# Altium PCB EST_MainV20.PcbDoc (part 5 of 7)
Units mil, origin at the board's own origin, x right, y up, seen from the top; angles counter-clockwise.
Board outline 2745 x 4540 mil, 2 copper layers (Top Layer, Bottom Layer); 326 components, 241 nets, 1052 pads, 399 vias.
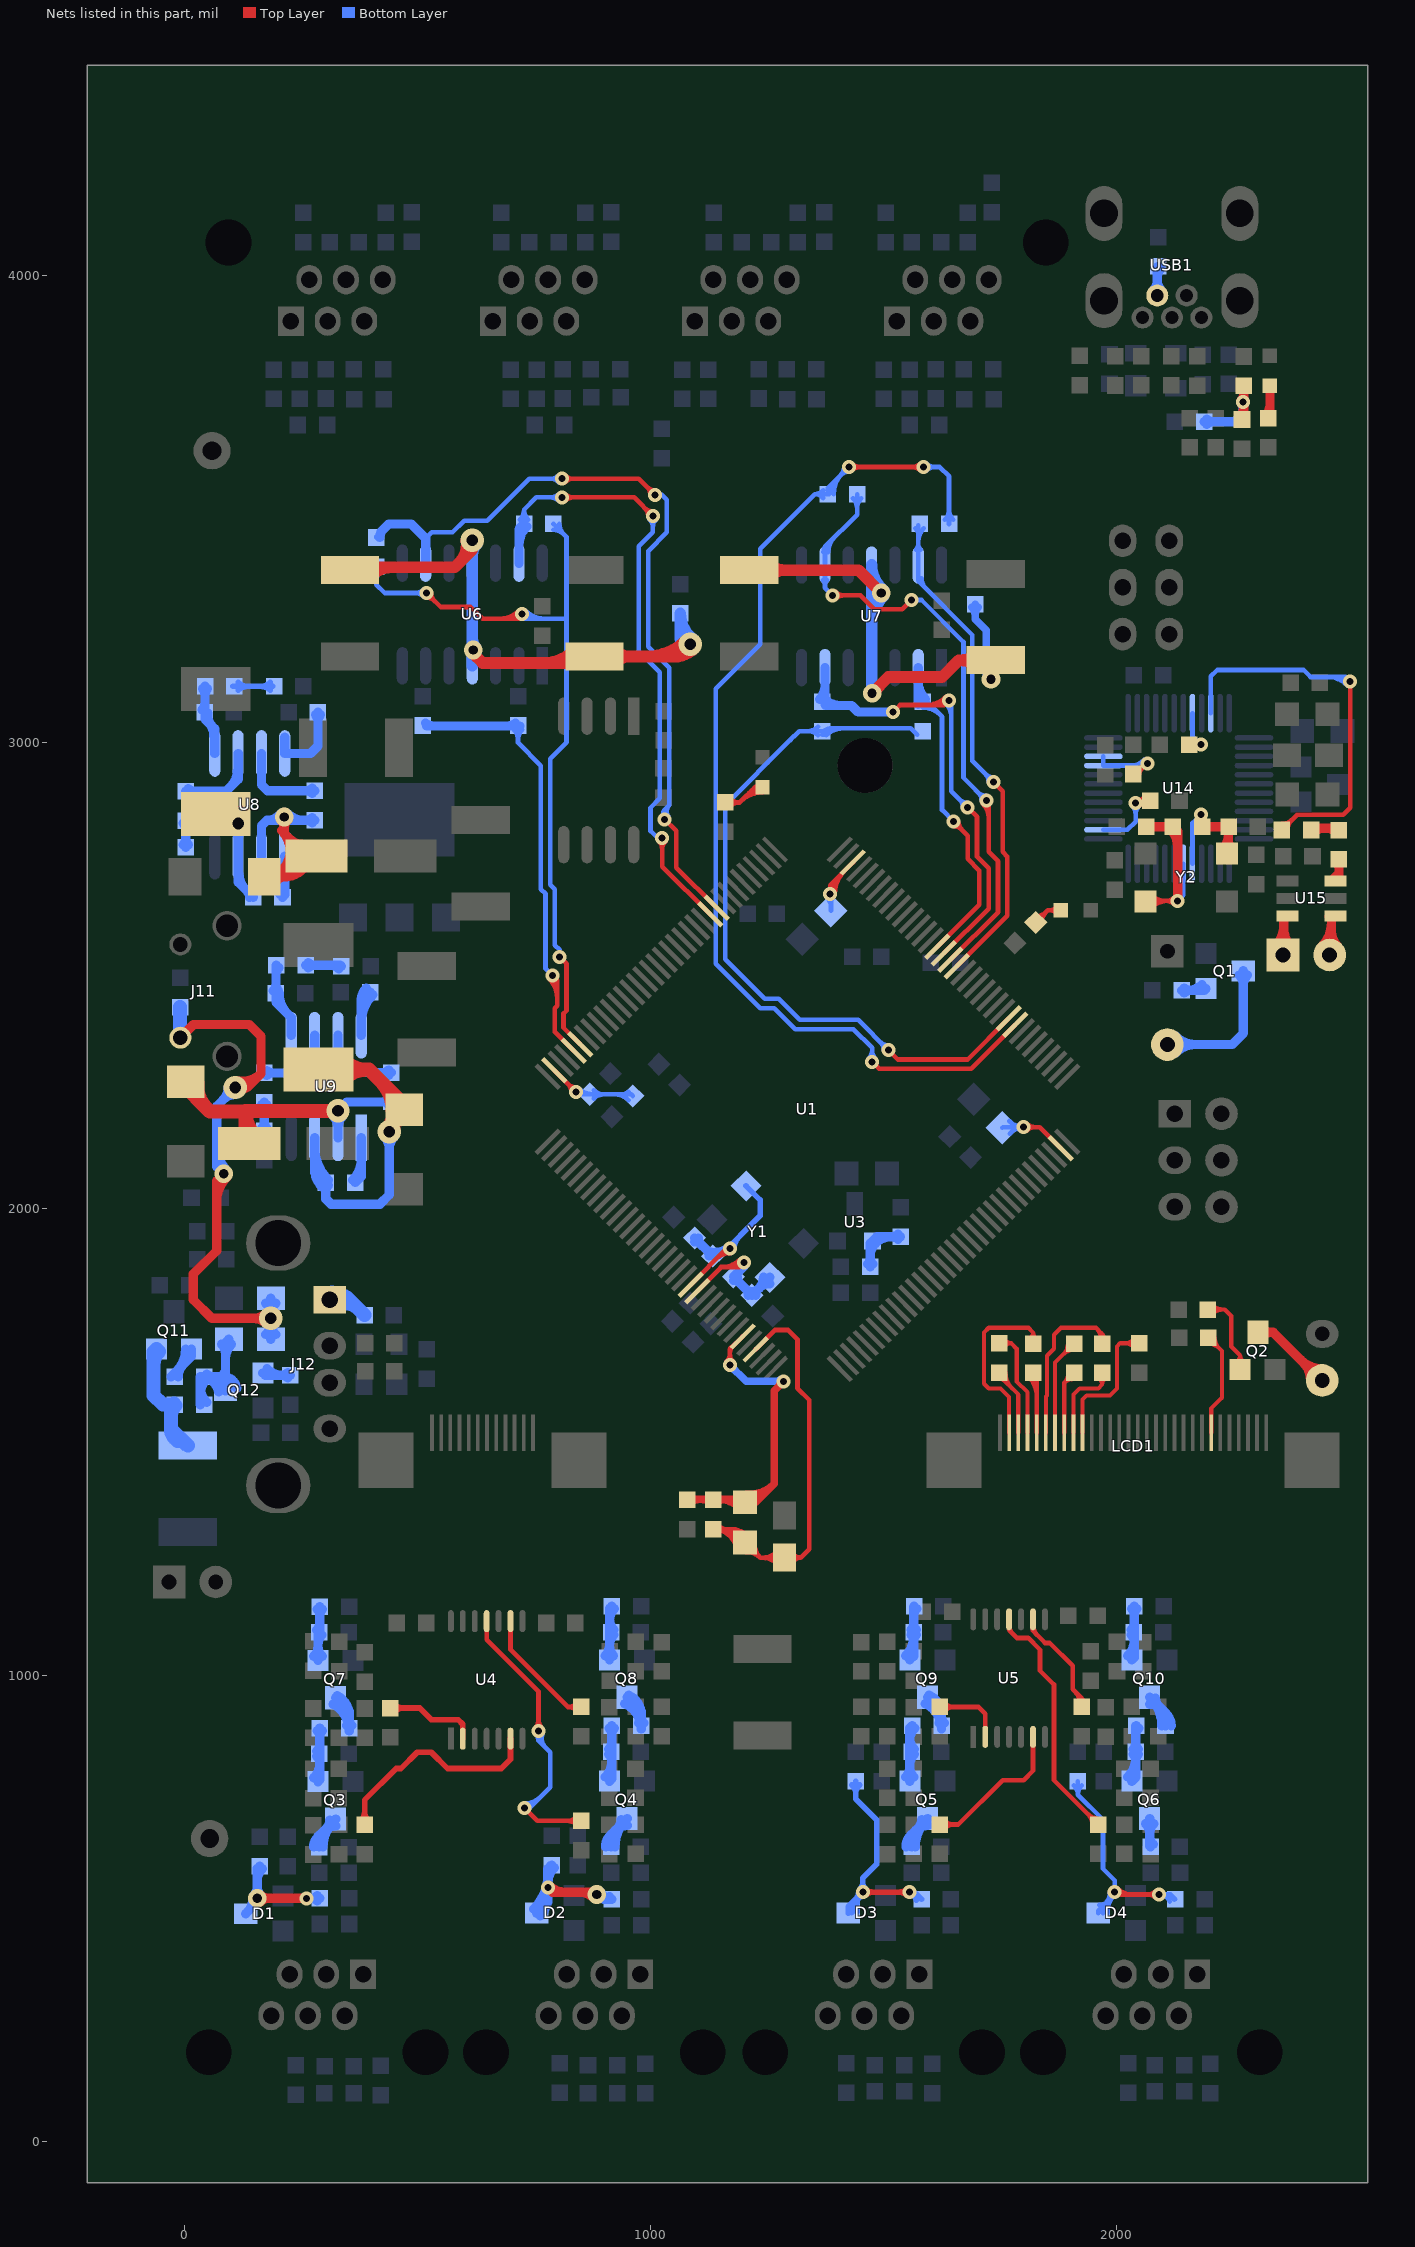
[diagram p5: the nets of this part, all layers, seen from the top]

## Via types
v1: diameter 30, hole 15, Top Layer to Bottom Layer, 237 vias
v2: diameter 50, hole 25, Top Layer to Bottom Layer, 93 vias
v3: diameter 40, hole 20, Top Layer to Bottom Layer, 68 vias
v4: diameter 60, hole 25, Top Layer to Bottom Layer, 1 vias

## Nets (pads, with @x,y where several pads share a name; then routed paths per layer and width w, separated by ;. In a path a pad name is that pad's centre, name@x,y a point inside that pad or via, vN(x,y) a via of type N, cw(c..) or ccw(c..) an arc to the next point about the centre after c; other vN are vias at no path point) (continued)
MAPWM: R105.2 R106.2 U1.140 | length 1106.5
  Top Layer w10: v1@782.93,2492.93 cw(c741.72,2451.72) 800,2451.72 ; 800,2475.86 ccw(c765.86,2475.86) v1(790,2500) 800,2490 800,2435 795,2430 795,2379.05 U1.140@835.41,2338.64
  Bottom Layer w10: R105.2@707.02,3027.02 cw(c685.32,3005.31) 716.02,3005.31 cw(c746.72,3005.31) R105.2@725.01,3027.02 ; R105.2@716.02,3036.01 716.02,3035 716.02,2998.98 765,2950 765,2685 775,2675 775,2515 v1(790,2500)
  Bottom Layer w20: R106.2@517.47,3041.46 ccw(c533.08,3057.07) 533.08,3035 ; R106.2@520,3035 716.02,3035 R105.2@720,3035 ; 694.95,3035 ccw(c694.95,3057.07) R105.2@710.56,3041.46
MBIN0: R108.1 U1.118 U6.9 | length 1916.6
  Top Layer w10: v1(810,3565) 975,3565 v1(1010,3530) ; v1@817.07,3557.93 cw(c834.14,3540.86) 834.14,3565 cw(c834.14,3589.14) v1@817.07,3572.07 ; v1@1000,3530 ccw(c975.86,3530) 992.93,3547.07 ccw(c1010,3564.14) v1@1010,3540 ; v1(1030,2835) 1055,2810 1055,2731.5 U1.118@1141.64,2644.86
  Bottom Layer w10: R108.1@412.02,3439 412.02,3441 R108.1@423,3451.98 ; 518,3437 531,3450 575.5,3450 600.5,3475 650,3475 740,3565 v1(810,3565) ; v1@802.93,3557.93 ccw(c785.86,3540.86) 785.86,3565 ccw(c785.86,3589.14) v1@802.93,3572.07 ; v1(1010,3530) 1025,3530 1035,3520 1035,3450 995,3410 995,3205 1040,3160 1040,2865 ; 1031.72,2856.72 ccw(c1043.58,2844.85) v1(1030,2835) 1030,2855 1040,2865 ; v1@1038.09,2840.87 cw(c1053.18,2851.82) 1040,2865
  Bottom Layer w20: R108.1@419.73,3439 cw(c443.19,3439) R108.1@426.6,3455.59 ; R108.1@423,3451.98 439,3467.98 487.02,3467.98 518,3437 U6.9@518,3384
MBIN1: R107.1 U1.119 U6.13 | length 1668
  Top Layer w10: v1(810,3525) 965,3525 v1(1005,3485) ; v1@817.07,3517.93 cw(c834.14,3500.86) 834.14,3525 cw(c834.14,3549.14) v1@817.07,3532.07 ; v1@995,3485 ccw(c970.86,3485) 987.93,3502.07 ccw(c1005,3519.14) v1@1005,3495 ; v1@1017.93,2787.93 cw(c1000.86,2770.86) 1025,2770.86 cw(c1049.14,2770.86) v1@1032.07,2787.93 ; v1(1025,2795) 1025,2733.66 U1.119@1127.72,2630.95
  Bottom Layer w10: R107.1@720.01,3477.01 ccw(c698.3,3498.72) 729,3498.72 ccw(c759.7,3498.72) R107.1@737.99,3477.01 ; R107.1@729,3479 R107.1@729,3468.02 729,3499 755,3525 v1(810,3525) ; v1@802.93,3517.93 ccw(c785.86,3500.86) 785.86,3525 ccw(c785.86,3549.14) v1@802.93,3532.07 ; v1@997.93,3477.93 cw(c980.86,3460.86) 1005,3460.86 cw(c1029.14,3460.86) v1@1012.07,3477.93 ; v1(1005,3485) 1005,3450 975,3420 975,3195 1020,3150 1020,2880 1000,2860 1000,2810 1015,2795 v1(1025,2795)
  Bottom Layer w20: U6.13@718,3384 718,3457.02 R107.1@729,3468.02 ; U6.13@718,3422.83 cw(c774.19,3422.83) R107.1@734.46,3462.56
MBPWM: R107.2 R108.2 U1.139 | length 1952.3
  Top Layer w10: v1@520,3310 cw(c520,3285.86) 537.07,3302.93 cw(c554.14,3320) v1@530,3320 ; v1(520,3320) 550,3290 615,3290 640,3265 v1@725,3265 ; 676.72,3265 ccw(c676.72,3323.28) v1@717.93,3282.07 ; 700.86,3265 ccw(c700.86,3299.14) v1(725,3275) ; v1(805,2540) 820,2525 820,2425 813.44,2418.44 813.44,2388.44 U1.139@849.33,2352.56
  Bottom Layer w10: R108.2@403.02,3367.02 cw(c381.32,3345.31) 412.02,3345.31 cw(c442.72,3345.31) R108.2@421.01,3367.02 ; R108.2@412.02,3376.01 412.02,3337.98 430,3320 v1(520,3320) ; v1@512.93,3312.93 ccw(c495.86,3295.86) 495.86,3320 ccw(c495.86,3344.14) v1@512.93,3327.07 ; v1@725,3265 820,3265 ; v1(725,3275) ccw(c749.14,3299.14) 749.14,3265 ; v1@732.07,3282.07 ccw(c773.28,3323.28) 773.28,3265 ; R107.2@791.99,3455.3 cw(c791.99,3424.6) 813.7,3446.31 cw(c835.41,3468.02) R107.2@804.71,3468.02 ; R107.2@791.99,3468.02 820,3440.01 820,3265 ; 805,2555 795,2565 795,2685 785,2695 785,2965 820,3000 820,3265
MCIN0: R124.1 U1.92 U7.6 | length 1186.4
  Top Layer w10: v1(1520,3065) 1535,3080 1630,3080 v1(1640,3090) cw(c1615.86,3114.14) 1615.86,3080 ; 1591.72,3080 ccw(c1591.72,3138.28) v1@1632.93,3097.07 ; U1.92@1628.82,2547.43 1725,2643.61 1725,2730 1700,2755 1700,2840 v1(1680,2860)
  Bottom Layer w10: v1@1632.93,3082.93 cw(c1603.79,3053.79) 1645,3053.79 ; v1(1640,3090) 1645,3085 1645,2895 v1(1680,2860) ; v1@1670,2860 ccw(c1645.86,2860) 1662.93,2877.07 ccw(c1680,2894.14) v1@1680,2870
  Bottom Layer w20: R124.1@1362.56,3092.46 ccw(c1334.94,3120.08) U7.6@1374,3120.08 ; R124.1@1373.47,3092.46 ccw(c1405.96,3124.94) 1405.96,3079 ; R124.1@1374,3081.02 U7.6@1374,3160 ; R124.1@1376.02,3079 1431,3079 1445,3065 v1(1520,3065)
MCIN1: R123.1 U1.93 U7.2 | length 844.1
  Top Layer w10: U1.93@1614.9,2561.35 1705,2651.45 1705,2725 1680,2750 1680,2800 v1(1650,2830) ; v1@1650,2820 cw(c1650,2795.86) 1667.07,2812.93 cw(c1684.14,2830) v1@1660,2830
  Bottom Layer w10: R123.1@1572.02,3079 R123.1@1576,3079 ; R123.1@1584.02,3074.28 cw(c1584.02,3021.89) 1621.06,3058.94 ; R123.1@1584.02,3084.28 cw(c1584.02,3056.04) 1603.99,3076.01 ; R123.1@1584.02,3087 1593,3087 1625,3055 1625,2890 1625,2855 v1(1650,2830)
  Bottom Layer w20: R123.1@1574,3080.98 U7.2@1574,3160 ; U7.2@1574,3129.81 ccw(c1626.83,3129.81) R123.1@1589.47,3092.46
MCPWM: R123.2 R124.2 U1.82 | length 1729.7
  Top Layer w10: v1(1510,2340) 1530,2320 1679.78,2320 U1.82@1768.01,2408.23
  Bottom Layer w10: 1311.01,3016.01 1300,3005 ; R124.2@1359.02,3015.02 ccw(c1337.32,2993.31) 1337.32,3024.01 ccw(c1337.32,3054.71) R124.2@1359.02,3033 ; R124.2@1368.02,3016.01 1376.02,3016.01 1390.01,3030 ; R124.2@1368.02,3024.01 1319.01,3024.01 1300,3005 ; R124.2@1369.94,3022.09 cw(c1389.04,3002.98) 1389.04,3030 ; R124.2@1377.01,3015.02 cw(c1413.18,2978.84) 1413.18,3030 ; R124.2@1380.57,3021.97 cw(c1390.01,3020.44) 1390.01,3030 ; v1@1500,2340 ccw(c1475.86,2340) 1492.93,2357.07 ccw(c1510,2374.14) v1@1510,2350 ; v1(1510,2340) 1445,2405 1320,2405 1275,2450 1245,2450 1160,2535 1160,2865 1300,3005 ; R123.2@1572.02,3016.01 1558.02,3030 1390.01,3030
MDIN0: R126.1 U1.91 U7.9 | length 1577.9
  Top Layer w10: v1(1390,3315) 1450,3315 1480,3285 1540,3285 v1(1560,3305) ; v1@1397.07,3307.93 cw(c1414.14,3290.86) 1414.14,3315 cw(c1414.14,3339.14) v1@1397.07,3322.07 ; U1.91@1642.74,2533.51 1745,2635.77 1745,2745 1725,2765 1725,2870 v1(1720,2875) ; v1@1712.93,2867.93 cw(c1683.79,2838.79) 1725,2838.79
  Bottom Layer w10: U7.9@1369.05,3347.05 cw(c1357.1,3335.1) 1374,3335.1 cw(c1390.9,3335.1) U7.9@1378.95,3347.05 ; U7.9@1371,3408 cw(c1390.31,3408) 1376.66,3421.66 ; U7.9@1381,3408 cw(c1424.46,3408) 1393.73,3438.73 ; v1(1390,3315) 1374,3331 U7.9@1374,3380 1374,3419 1443,3488 R126.1@1443,3531.98 ; R126.1@1434.01,3522.99 cw(c1412.3,3501.28) 1443,3501.28 cw(c1473.7,3501.28) R126.1@1451.99,3522.99 ; v1(1560,3305) 1580.91,3305 1671,3214.91 1671,2924 v1(1720,2875) ; v1@1710,2875 ccw(c1685.86,2875) 1702.93,2892.07 ccw(c1720,2909.14) v1@1720,2885
MDIN1: R125.1 U1.90 U7.13 | length 1206.8
  Top Layer w10: U1.90@1656.66,2519.59 1765,2627.94 1765,2755 1755,2765 1755,2895 v1(1735,2915)
  Bottom Layer w10: R125.1@1568.01,3459.02 cw(c1553.54,3444.56) 1574,3444.56 ; U7.13@1569.05,3412.95 ccw(c1557.1,3424.9) 1574,3424.9 ccw(c1590.9,3424.9) U7.13@1578.95,3412.95 ; 1574,3430.07 cw(c1614.94,3430.07) R125.1@1585.99,3459.02 ; R125.1@1574,3465.02 U7.13@1574,3380 1574,3346 1690,3230 1690,2960 v1(1735,2915) ; U7.13@1581,3352 ccw(c1612.38,3352) 1590.19,3329.81 ; v1@1725,2915 ccw(c1700.86,2915) 1717.93,2932.07 ccw(c1735,2949.14) v1@1735,2925
MDPWM: R125.2 R126.2 U1.81 | length 2684.8
  Top Layer w10: v1(1425,3590) v1(1585,3590) ; v1@1432.07,3582.93 cw(c1449.14,3565.86) 1449.14,3590 cw(c1449.14,3614.14) v1@1432.07,3597.07 ; v1(1475,2315) 1490,2300 1687.61,2300 U1.81@1781.93,2394.32 ; v1@1577.93,3582.93 ccw(c1560.86,3565.86) 1560.86,3590 ccw(c1560.86,3614.14) v1@1577.93,3597.07
  Bottom Layer w10: R126.2@1370.44,3523.61 ccw(c1351.99,3507.47) 1351.99,3531.98 ; R126.2@1370.44,3540.36 cw(c1351.99,3556.5) 1351.99,3531.98 ; R126.2@1382.72,3531.98 cw(c1420.73,3531.98) 1393.85,3558.85 ; R126.2@1392.72,3531.98 cw(c1454.87,3531.98) 1410.93,3575.93 ; v1@1425,3580 ccw(c1425,3555.86) 1407.93,3572.93 ccw(c1390.86,3590) 1415,3590 v1(1425,3590) 1380.01,3545.01 R126.2@1380.01,3531.98 1351.98,3531.98 ; v1@1467.93,2322.07 ccw(c1450.86,2339.14) 1475,2339.14 ccw(c1499.14,2339.14) v1@1482.07,2322.07 ; v1(1475,2315) 1475,2345 1435,2385 1310,2385 1265,2430 1235,2430 1140,2525 1140,3115 1235,3210 1235,3415 1351.98,3531.98 ; v1(1585,3590) 1620,3590 1639.99,3570.01 R125.2@1639.99,3468.02 ; v1@1592.07,3582.93 cw(c1609.14,3565.86) 1609.14,3590 cw(c1609.14,3614.14) v1@1592.07,3597.07 ; R125.2@1631,3477.01 ccw(c1609.29,3498.72) 1639.99,3498.72 ccw(c1670.69,3498.72) R125.2@1648.98,3477.01
NetC1_1: C1.1 LCD1.29 | length 419
  Top Layer w9: LCD1.29@1768.82,1520 1768.82,1596.18 1750,1615 1725,1615 1715,1625 1715,1735 1725,1745 1810,1745 1820.16,1734.84 ; C1.1@1813.2,1722.36 ccw(c1805.47,1734.84) 1820.16,1734.84 ; C1.1@1820.16,1711.12 1820.16,1734.84 ; C1.1@1827.11,1722.36 cw(c1834.84,1734.84) 1820.16,1734.84
NetC1_2: C1.2 LCD1.26 | length 205.8
  Top Layer w9: C1.2@1810.81,1638.78 cw(c1769.62,1597.59) 1827.87,1597.59 ; C1.2@1817.18,1645.14 cw(c1791.35,1619.31) 1827.87,1619.31 ; C1.2@1820.16,1648.13 1820.16,1640 1827.87,1632.28 LCD1.26@1827.87,1520
NetC2_1: C2.1 LCD1.28 | length 216.6
  Top Layer w9: C2.1@1747.84,1635.67 cw(c1747.84,1619.99) 1758.92,1631.08 ; C2.1@1747.84,1648.88 1747.84,1642.16 1788.5,1601.5 LCD1.28@1788.5,1520 ; C2.1@1752.06,1648.88 ccw(c1778.47,1648.88) 1759.8,1630.2 ; C2.1@1761.06,1648.88 ccw(c1809.2,1648.88) 1775.16,1614.84
NetC2_2: C2.2 LCD1.27 | length 265.5
  Top Layer w9: C2.2@1747.84,1711.88 1773.13,1711.88 ; C2.2@1758.7,1704.33 cw(c1773.12,1694.3) 1773.12,1711.88 ; C2.2@1758.7,1719.42 ccw(c1773.12,1729.45) 1773.12,1711.88 ; LCD1.27@1808.19,1520 1808.19,1606.81 1785,1630 1785,1700 1773.13,1711.88
NetC3_1: C3.1 LCD1.25 | length 435.2
  Top Layer w9: LCD1.25@1847.56,1520 1847.56,1597.56 1850,1600 1850,1685 1865,1700 1865,1730 1880,1745 1955,1745 1968.16,1731.84 ; 1955.58,1744.42 cw(c1932.17,1721.01) C3.1@1964.09,1712.24 ; C3.1@1962.58,1723.1 ccw(c1958.52,1731.84) 1968.16,1731.84 ; 1966.52,1733.48 cw(c1949.33,1716.29) C3.1@1972.77,1709.85 ; C3.1@1968.16,1711.12 1968.16,1731.84 ; C3.1@1973.73,1723.1 cw(c1977.8,1731.84) 1968.16,1731.84
NetC3_2: C3.2 LCD1.22 | length 210.1
  Top Layer w9: LCD1.22@1906.61,1520 1906.61,1601.61 1920,1615 1960,1615 1968.16,1623.16 ; C3.2@1960.73,1637.2 cw(c1951.18,1623.16) 1968.16,1623.16 ; C3.2@1968.16,1648.13 1968.16,1623.16 ; C3.2@1975.59,1637.2 ccw(c1985.13,1623.16) 1968.16,1623.16
NetC4_1: C4.1 LCD1.24 | length 258.2
  Top Layer w9: LCD1.24@1867.24,1520 1867.24,1670.21 C4.1@1908.16,1711.12 ; C4.1@1894.94,1711.12 cw(c1863.03,1711.12) 1885.6,1688.56 cw(c1908.16,1665.99) C4.1@1908.16,1697.9
NetC4_2: C4.2 LCD1.23 | length 182.5
  Top Layer w9: LCD1.23@1886.93,1520 1886.93,1626.9 ; C4.2@1894.95,1647.54 cw(c1867.5,1646.33) 1886.93,1626.9 ; C4.2@1907.57,1634.92 ccw(c1906.36,1607.46) 1886.93,1626.9 ; C4.2@1908.16,1648.13 1886.93,1626.9
NetC5_2: C5.2 LCD1.21 | length 345.6
  Top Layer w9: LCD1.21@1926.3,1520 1926.3,1591.3 1935,1600 1985,1600 2000,1615 2000,1705 2006.88,1711.88 C5.2@2047.84,1711.88 ; C5.2@2038.5,1702.53 ccw(c2015.94,1679.97) 2015.94,1711.87 ccw(c2015.94,1743.78) C5.2@2038.5,1721.22
NetC6_2: C6.2 R4.2 U1.23 Y1.1 | length 581.1
  Top Layer w10: U1.23@1085.96,1837.54 1163.42,1915 v1(1170,1915) ; 1141.7,1893.28 cw(c1170,1864.97) v1@1170,1905
  Bottom Layer w12: R4.2@1133.37,1898.33 ccw(c1133.37,1934.44) v1@1158.91,1908.91 ; R4.2@1133.37,1898.61 1148.61,1898.61 1235,1985 1235,2019.01 Y1.1@1204.78,2049.23 ; R4.2@1133.37,1910.33 ccw(c1133.37,1975.41) 1179.39,1929.39 ; v1@1179,1915 cw(c1212.8,1915) 1188.9,1938.9
  Bottom Layer w20: C6.2@1094.43,1929.63 cw(c1094.43,1911) 1107.6,1924.18 cw(c1120.77,1937.35) C6.2@1102.14,1937.35 ; C6.2@1094.43,1937.35 R4.2@1133.17,1898.61 ; 1119.85,1911.92 ccw(c1133.37,1925.44) R4.2@1133.37,1906.33 ; 1120.33,1911.44 cw(c1107.5,1898.61) R4.2@1125.65,1898.61
NetC7_2: C7.2 R4.1 U1.24 Y1.2 | length 514.2
  Top Layer w10: U1.24@1099.88,1823.62 1151.26,1875 1190,1875 v1(1200,1885) cw(c1175.86,1909.14) 1175.86,1875 ; 1151.72,1875 ccw(c1151.72,1933.28) v1@1192.93,1892.07
  Bottom Layer w20: R4.1@1177.91,1846.35 cw(c1177.91,1827.72) 1191.08,1840.9 cw(c1204.25,1854.07) R4.1@1185.63,1854.07 ; R4.1@1185.21,1861.37 ccw(c1161.59,1885) v1@1195,1885 ; v1(1200,1885) 1200,1876.16 R4.1@1177.91,1854.07 1217.33,1814.65 C7.2@1217.57,1814.65 Y1.2@1255.91,1853.06 Y1.2@1255.91,1853.06 ; 1203.98,1828 ccw(c1217.57,1841.59) 1217.57,1822.37 ccw(c1217.57,1841) 1230.74,1827.82 ccw(c1243.92,1814.65) C7.2@1225.29,1814.65 ; 1204.57,1827.41 cw(c1191.82,1814.65) C7.2@1209.86,1814.65 ; 1232.61,1829.69 ccw(c1209.24,1853.06) Y1.2@1242.29,1853.06 ; 1232.77,1829.85 cw(c1255.91,1806.71) Y1.2@1255.91,1839.44
NetC9_1: C9.1 U1.71 | length 288.6
  Top Layer w10: v1(1800,2175) 1834.21,2175 U1.71@1879.37,2129.85 ; v1@1807.07,2167.93 cw(c1824.14,2150.86) 1824.14,2175 cw(c1824.14,2199.14) v1@1807.07,2182.07
  Bottom Layer w10: C9.1@1754.32,2173.59 1755.73,2175 v1(1800,2175) ; C9.1@1769.02,2188.01 ccw(c1800,2218.39) v1(1800,2175) ; C9.1@1770.42,2160.75 cw(c1800,2137.18) v1(1800,2175) ; v1@1792.93,2167.93 ccw(c1775.86,2150.86) 1775.86,2175 ccw(c1775.86,2199.14) v1@1792.93,2182.07
NetC10_2: C10.2 U1.106 | length 250.9
  Top Layer w10: v1@1395,2675 cw(c1463.46,2675) U1.106@1415.05,2723.41 ; 1397.98,2706.34 ccw(c1429.32,2675) v1(1385,2675) 1385,2693.36 U1.106@1433.94,2742.3
  Bottom Layer w10: v1@1377.93,2667.93 cw(c1356.43,2646.43) C10.2@1386.83,2646.43 ; v1(1385,2675) 1386.83,2673.17 C10.2@1386.83,2638.92 ; C10.2@1386.83,2655.29 cw(c1404.71,2655.29) C10.2@1392.07,2667.93
NetC13_1: C13.1 C14.2 R10.2 U1.31 | length 1052.8
  Top Layer w10: v1@1162.93,1672.07 ccw(c1145.86,1689.14) 1170,1689.14 ccw(c1194.14,1689.14) v1@1177.07,1672.07 ; v1(1170,1665) 1170,1698.87 U1.31@1197.31,1726.18 ; 1170,1690.67 cw(c1189.79,1690.67) 1175.8,1704.66 ccw(c1178.69,1696.47) 1170,1696.47
  Top Layer w16: R10.2@1079.02,1376.99 C14.2@1134.73,1376.99 ; R10.2@1085.89,1369.12 cw(c1104.89,1350.12) 1104.89,1376.99 ; R10.2@1085.89,1382.86 ccw(c1100.06,1397.04) 1100.06,1376.99 ; 1108.69,1376.99 cw(c1108.69,1349.72) C14.2@1127.97,1369 ; 1114.08,1376.99 ccw(c1114.08,1396.64) C14.2@1127.97,1382.75 ; C14.2@1134.84,1376.99 C13.1@1215.98,1376.99 ; C14.2@1141.71,1369 cw(c1161,1349.72) 1161,1376.99 ; C14.2@1141.71,1382.75 ccw(c1155.6,1396.64) 1155.6,1376.99 ; C14.2@1145.87,1376.99 cw(c1145.87,1313.88) C13.1@1190.5,1358.51 ; 1175.07,1376.99 ccw(c1175.07,1398.81) C13.1@1190.5,1383.38 ; C13.1@1202.94,1370.94 1225.95,1370.94 1265,1410 ; C13.1@1203.09,1372.53 ccw(c1207.76,1419.45) 1241.11,1386.11 ; C13.1@1204.68,1388.45 ccw(c1212.09,1462.91) 1265,1410 ; v1(1285,1630) 1265,1610 1265,1410
  Bottom Layer w16: v1@1170,1658 cw(c1170,1641.1) 1181.95,1653.05 cw(c1193.9,1665) v1@1177,1665 ; v1@1170,1660 v1(1170,1665) 1205,1630 v1(1285,1630) ; v1@1280.05,1625.05 ccw(c1268.1,1613.1) 1268.1,1630 ccw(c1268.1,1646.9) v1@1280.05,1634.95
NetC13_2: C13.2 C14.1 L1.1 U1.33 | length 1372.2
  Top Layer w10: C14.1@1143.83,1303.89 cw(c1165.54,1282.18) 1165.54,1312.88 cw(c1165.54,1343.58) C14.1@1143.83,1321.87 ; C14.1@1148.7,1312.88 cw(c1148.7,1266.33) C13.2@1192.89,1280.99 ; 1162.56,1312.88 cw(c1162.56,1270.93) C13.2@1202.38,1284.14 ; 1176.41,1312.88 cw(c1176.41,1275.53) C13.2@1211.87,1287.3 ; C13.2@1182.6,1287.57 ccw(c1153.68,1292.17) 1174.39,1312.88 ; C13.2@1183.4,1277.84 ccw(c1134.85,1261.73) C14.1@1134.84,1312.88 1174.39,1312.88 ; C13.2@1199.7,1304.67 cw(c1195.1,1333.59) 1174.39,1312.88 ; C13.2@1204.19,1263.78 cw(c1206.65,1223.39) 1235.27,1252 ; C13.2@1223.49,1283.08 ccw(c1263.88,1280.62) 1235.27,1252 ; U1.33@1225.15,1698.35 1266.81,1740 1295,1740 1315,1720 1315,1615 1340,1590 1340,1365 ; L1.1@1272.92,1237.86 ccw(c1238.78,1203.72) 1238.78,1252 ccw(c1238.78,1300.28) L1.1@1272.92,1266.14 ; L1.1@1304.31,1241.87 cw(c1322,1231.49) 1322,1252 ; L1.1@1304.31,1262.13 ccw(c1322,1272.51) 1322,1252 ; 1340,1400 1340,1365 ; 1174.39,1312.88 C13.2@1202.94,1284.33 1235.27,1252 ; 1235.27,1252 L1.1@1287.06,1252 1322,1252 ; 1322,1252 1340,1270 1340,1365
  Top Layer w30: L1.1@1278.73,1260.33 L1.1@1287.06,1252
NetC40_2: C40.2 E1.1 F2.2 U6.4 U6.11 | length 1757.8
  Top Layer w25: F2.2@356,3369 362,3375 580,3375 618,3413 v2(618,3433) ; F2.2@400.87,3356.63 cw(c445.23,3312.27) 445.23,3375 ; 590,3385 ccw(c551.1,3423.9) v2@605.61,3431.32 ; v3@620,3203 620,3190 640,3170 665,3170 830,3170 844,3184 E1.1@880,3184 ; 771.45,3170 ccw(c771.45,3260.05) E1.1@835.13,3196.37 ; E1.1@839,3184 E1.1@880,3184 ; E1.1@924.87,3171.63 cw(c954.75,3141.75) 954.75,3184 cw(c954.75,3226.25) E1.1@924.87,3196.37 ; 992.05,3184 ccw(c992.05,3302.95) v2@1076.16,3218.84 ; 1052.41,3184 ccw(c1052.41,3242.59) v2@1093.84,3201.16 ; v2(1085,3210) 1059,3184 E1.1@880,3184
  Bottom Layer w25: v2@609.16,3424.16 cw(c587.82,3402.82) 618,3402.82 cw(c648.18,3402.82) v2@626.84,3424.16 ; U6.4@618,3164 U6.11@618,3384 v2@618,3443 ; U6.4@618,3175.07 cw(c642.94,3175.07) U6.4@625.3,3192.7 ; 618,3220.94 ccw(c642.94,3220.94) v3@625.3,3203.3 ; 1063.84,3227.01 ccw(c1097.38,3227.01) v2@1077.64,3199.89 ; v2(1085,3210) 1063.84,3231.16 C40.2@1063.84,3276.12 ccw(c1133.12,3276.12) v2@1092.36,3220.11
  other v3: 620,3198
NetC48_2: C48.2 E2.1 F3.2 U7.4 U7.11 | length 1485.1
  Top Layer w25: F3.2@1212,3369 1446,3369 v3(1495,3320) ; F3.2@1256.87,3356.63 cw(c1286.75,3326.75) 1286.75,3369 cw(c1286.75,3411.25) F3.2@1256.87,3381.37 ; v3(1475,3105) 1510,3140 1625,3140 1661,3176 E2.1@1740,3176 ; E2.1@1695.13,3163.63 ccw(c1665.25,3133.75) 1665.25,3176 ccw(c1665.25,3218.25) E2.1@1695.13,3188.37
  Bottom Layer w16: C48.2@1688.97,3289.25 cw(c1672.39,3272.67) 1695.84,3272.67 cw(c1719.3,3272.67) C48.2@1702.71,3289.25 ; C48.2@1695.84,3296.12 1695.84,3264.16 1720,3240 1720,3145 v3(1730,3135) ; 1720,3188.11 ccw(c1783.11,3188.11) v3@1738.49,3143.49
  Bottom Layer w25: U7.4@1474,3125.52 ccw(c1495.52,3125.52) v3@1480.3,3110.3 ; 1474,3251.19 cw(c1563.81,3251.19) v3@1500.3,3314.7 ; 1474,3311.55 cw(c1503.45,3311.55) v3@1482.63,3332.37 ; 1474,3327.37 ccw(c1501.01,3327.37) v3@1483.94,3306.44 ; v3(1475,3105) 1474,3106 U7.4@1474,3160 1474,3320 ; v3(1495,3320) 1474,3320 ; v3@1499.74,3325.81 cw(c1543.9,3380) U7.11@1474,3380 1474,3320
NetC55_1: C55.1 U8.1 | length 117.6
  Bottom Layer w20: C55.1@205.66,2673.61 ccw(c180.7,2698.57) 216,2698.57 ; C55.1@211.12,2668.16 216,2673.04 U8.1@216,2756
NetC55_2: C55.2 L2.1 U8.3 | length 323.2
  Top Layer w20: L2.1@95.86,2846.14 v2(116,2826)
  Bottom Layer w20: v2@105.39,2815.39 cw(c79.79,2789.79) 116,2789.79 cw(c152.21,2789.79) v2@126.61,2815.39 ; v2(116,2826) U8.3@116,2756 116,2700.28 C55.2@148.12,2668.16 ; U8.3@118,2718 ccw(c165.6,2718) C55.2@131.94,2684.34 ; C55.2@140.41,2668.16 ccw(c121.78,2668.16) 134.95,2681.33 ccw(c148.12,2694.5) C55.2@148.12,2675.87
NetC56_1: C56.1 U9.1 | length 150.4
  Bottom Layer w20: C56.1@361.66,2061.61 ccw(c317.39,2105.89) U9.1@380,2105.89 ; C56.1@367.12,2056.16 380,2069.04 U9.1@380,2152
NetC56_2: C56.2 D6.2 L3.1 U9.3 | length 1264.9
  Top Layer w20: v2@440,2157.8 cw(c469.25,2157.8) D6.2@468.04,2187.02 ; v2(440,2165) 440,2188 464,2212 ccw(c492.95,2183.05) v2@454.2,2169.84 ; D6.2@440,2178.65 cw(c468.38,2178.65) D6.2@467.21,2207
  Top Layer w30: L3.1@288,2298.14 396.86,2298.14 464,2231 D6.2@464,2212 ; L3.1@338.36,2275.34 cw(c393.4,2220.3) 393.4,2298.14 cw(c393.4,2375.99) L3.1@338.36,2320.94 ; 421.54,2273.46 cw(c360.09,2212) D6.2@447,2212
  Bottom Layer w20: 280,2084.74 ccw(c332.71,2084.74) C56.2@295.44,2047.47 ; U9.3@280,2133.03 ccw(c381,2133.03) C56.2@309.58,2061.61 ; U9.3@280,2152 280,2080.28 C56.2@304.12,2056.16 304.12,2020.88 315,2010 420,2010 440,2030 v2(440,2165) ; C56.2@296.41,2056.16 ccw(c277.78,2056.16) 290.95,2069.33 ccw(c304.12,2082.5) C56.2@304.12,2063.87 ; C56.2@298.67,2050.7 cw(c285.5,2037.53) 304.13,2037.53 cw(c322.75,2037.53) C56.2@309.58,2050.7 ; v2@429.39,2154.39 cw(c403.79,2128.79) 440,2128.79 cw(c476.21,2128.79) v2@450.61,2154.39
NetC57_1: C57.1 U8.8 | length 214.1
  Bottom Layer w20: U8.8@216,3011 U8.8@216,2976 271,2976 287.12,2992.12 C57.1@287.12,3064.16 ; C57.1@281.66,3058.7 cw(c268.49,3045.53) 287.12,3045.53 cw(c305.75,3045.53) C57.1@292.57,3058.7
NetC58_1: C58.1 U9.8 | length 214
  Bottom Layer w20: U9.8@380,2372 380,2450.04 ; U9.8@380,2399.37 cw(c463.9,2399.37) C58.1@404.57,2458.7 ; 380,2447.66 cw(c415.62,2447.66) C58.1@390.43,2472.84 ; C58.1@392.12,2462.16 380,2450.04 ; C58.1@399.12,2464.16 394.12,2464.16 380,2450.04
NetC59_1: C59.1 U8.6 | length 243.2
  Bottom Layer w20: C59.1@3.84,2895.12 90.12,2895.12 116,2921 U8.6@116,2976 ; C59.1@9.3,2889.66 cw(c22.47,2876.49) 22.47,2895.12 cw(c22.47,2913.75) C59.1@9.3,2900.57 ; 100.56,2905.56 ccw(c68.13,2938) U8.6@114,2938
NetC59_2: C59.2 R141.1 | length 115.7
  Bottom Layer w20: C59.2@-1.61,2826.67 cw(c-14.79,2813.5) 3.84,2813.5 cw(c22.47,2813.5) C59.2@9.3,2826.67 ; R141.1@-1.44,2780.46 ccw(c-14.2,2793.21) 3.84,2793.21 ; 3.84,2794.05 ccw(c23.06,2794.05) R141.1@9.47,2780.46 ; C59.2@3.84,2832.12 3.84,2775.17 R141.1@4.02,2775
NetC60_1: C60.1 U9.6 | length 210.2
  Bottom Layer w20: C60.1@171.84,2291.12 266.12,2291.12 280,2305 U9.6@280,2372 ; C60.1@177.3,2285.66 cw(c190.47,2272.49) 190.47,2291.12 cw(c190.47,2309.75) C60.1@177.3,2296.57
NetC60_2: C60.2 R142.1 | length 119.7
  Bottom Layer w20: C60.2@166.39,2222.67 cw(c153.21,2209.5) 171.84,2209.5 cw(c190.47,2209.5) C60.2@177.3,2222.67 ; R142.1@166.56,2172.46 ccw(c153.8,2185.21) 171.84,2185.21 ; 171.84,2186.05 ccw(c191.06,2186.05) R142.1@177.47,2172.46 ; C60.2@171.84,2228.12 171.84,2167.17 R142.1@172.02,2167
NetC69_2: C69.2 D10.2 D11.2 J11.1 | length 1731.8
  Top Layer w20: J11.1@-7.8,2366.72 20.48,2395 140,2395 165,2370 165,2290 ; 70,2014.64 cw(c145.36,2014.64) v3@92.07,2067.93 ; v3(85,2075) 70,2060 70,1910 20,1860 20,1805 60,1765 v2(186,1765) ; v2@108.95,2255.11 ccw(c115.81,2287.17) 138.99,2263.99 ; v2(110,2260) 135,2260 165,2290 ; v2@113.14,2274.67 ccw(c124.97,2330.03) 165,2290 ; v2@175.39,1754.39 ccw(c149.79,1728.79) 149.79,1765 ccw(c149.79,1801.21) v2@175.39,1775.61
  Bottom Layer w20: 70,2135.36 ccw(c145.36,2135.36) v3@92.07,2082.07 ; v3(85,2075) 70,2090 70,2220 v2(110,2260) ; v2@95,2260 cw(c58.79,2260) 84.39,2234.39 cw(c110,2208.79) v2@110,2245 ; D10.2@175.39,1730.61 ccw(c149.79,1756.21) 186,1756.21 ccw(c222.21,1756.21) D10.2@196.61,1730.61 ; v2@175.39,1754.39 cw(c149.79,1728.79) 186,1728.79 cw(c222.21,1728.79) v2@196.61,1754.39 ; v2@175.39,1775.61 ccw(c149.79,1801.21) 186,1801.21 ccw(c222.21,1801.21) v2@196.61,1775.61 ; D11.2@175.39,1797.39 cw(c149.79,1771.79) 186,1771.79 cw(c222.21,1771.79) D11.2@196.61,1797.39 ; D10.2@186,1720 v2(186,1765) D11.2@186,1808
  Bottom Layer w30: C69.2@-8.16,2432.12 -8.16,2367.08 J11.1@-7.8,2366.72
NetC76_2: C76.2 R166.1 U14.18 Y2.2 | length 665.3
  Top Layer w10: Y2.2@2062.13,2660 v1(2130,2660) ; Y2.2@2074.3,2645.83 cw(c2108.51,2611.63) 2108.51,2660 ; Y2.2@2074.3,2672.17 ccw(c2103.68,2701.54) 2103.68,2660 ; v1@2122.93,2652.93 ccw(c2105.86,2635.86) 2105.86,2660 ccw(c2105.86,2684.14) v1@2122.93,2667.07
  Top Layer w20: C76.2@2063.05,2818.98 R166.1@2120,2818.98 2130,2808.98 v1(2130,2660) ; C76.2@2068.33,2813.7 cw(c2081.09,2800.95) 2081.09,2818.98 ; C76.2@2068.33,2824.61 ccw(c2081.92,2838.2) 2081.92,2818.98 ; R166.1@2114.54,2824.44 cw(c2101.37,2837.61) 2101.37,2818.98 cw(c2101.37,2800.35) 2114.54,2813.53 cw(c2077.23,2776.21) 2130,2776.21
  Bottom Layer w10: v1@2122.93,2667.07 ccw(c2076.49,2713.51) U14.18@2142.17,2713.51 ; 2142.17,2689.37 cw(c2100.63,2689.37) v1(2130,2660) 2142.17,2672.17 U14.18@2142.17,2739.57
NetC77_2: C77.2 R166.2 U14.17 Y2.1 | length 374.1
  Top Layer w20: R166.2@2182.99,2818.98 2238.98,2818.98 2238.98,2764.54 Y2.1@2236,2761.56 ; R166.2@2188.45,2813.53 cw(c2201.62,2800.35) 2201.62,2818.98 cw(c2201.62,2837.61) R166.2@2188.45,2824.44 ; 2220.16,2818.98 cw(c2220.16,2799.87) 2233.67,2813.39 cw(c2220.84,2800.55) 2238.98,2800.55 ; 2220.84,2818.98 ccw(c2220.84,2837.13) C77.2@2233.67,2824.3 ; Y2.1@2226.37,2771.19 ccw(c2195.91,2801.65) C77.2@2238.98,2801.65 ; 2238.98,2787.24 ccw(c2261.68,2787.24) Y2.1@2245.63,2771.19 ; 2238.98,2799.87 cw(c2258.09,2799.87) C77.2@2244.58,2813.39
  Bottom Layer w10: U14.17@2161.85,2739.57 2161.85,2826.85 v1@2185,2850
  other v1: 2180,2845
NetC81_2: C81.2 U14.44 | length 134.7
  Top Layer w10: C81.2@2154.88,2995.16 2155.03,2995 v1(2180,2995) ; C81.2@2165.05,2987.53 cw(c2180,2976.31) v1(2180,2995) ; C81.2@2165.2,3002.58 ccw(c2180,3013.24) v1(2180,2995)
  Bottom Layer w10: U14.44@2161.85,3062.41 2161.85,3013.15 v1(2180,2995)
NetC82_1: C82.1 U15.3 | length 114.1
  Top Layer w20: U15.3@2460,2702.8 2475.84,2718.65 C82.1@2475.84,2752.88 ; C82.1@2470.39,2743.43 cw(c2457.21,2730.25) 2475.84,2730.25 cw(c2494.47,2730.25) C82.1@2481.3,2743.43 ; 2475.84,2716.75 ccw(c2493.76,2716.75) 2481.09,2704.08 cw(c2493.76,2716.75) 2475.84,2716.75
NetC82_2: C82.2 R168.2 | length 106.4
  Top Layer w20: R168.2@2419.88,2815.88 C82.2@2475.84,2815.88 ; R168.2@2421.45,2806.53 cw(c2444.01,2783.96) 2444.01,2815.88 ; 2447.56,2815.88 cw(c2447.56,2783.59) C82.2@2470.39,2806.42
NetD1_2: D1.2 R25.1 R37.1 | length 413
  Top Layer w20: v3(157.2,521.72) v1(262.2,521.72) ; v3@164.28,514.65 cw(c181.35,497.58) 181.35,521.72 cw(c181.35,545.86) v3@164.28,528.79
  Bottom Layer w20: D1.2@132.2,488.72 157.2,513.72 v3(157.2,521.72) 157.2,585.74 R37.1@162.19,590.72 ; D1.2@136.21,492.72 ccw(c109.52,519.41) v3@147.22,521.24 ; v3@150.13,528.79 ccw(c133.06,545.86) 157.2,545.86 ccw(c181.35,545.86) v3@164.28,528.79 ; 157.2,560.06 cw(c192.85,560.06) R37.1@167.64,585.26 ; v1(262.2,521.72) R25.1@291.2,521.74 ; R25.1@285.75,516.28 ccw(c272.57,503.11) 272.57,521.74 ccw(c272.57,540.37) R25.1@285.75,527.19
NetD2_2: D2.2 R27.1 R38.1 | length 542
  Top Layer w20: v1(780,545) 790,535 v3@885,535 ; v1@783.54,548.54 ccw(c816.21,581.21) 816.21,535 ; 848.79,535 cw(c848.79,493.79) v3@877.93,522.93
  Bottom Layer w20: D2.2@749.66,498.84 ccw(c676.42,572.08) 780,572.08 ; D2.2@756,490 780,514 780,585.02 R38.1@787.98,593 ; D2.2@763.8,484.7 ccw(c724.7,523.8) 780,523.8 ; v1@780,555.1 cw(c825.89,555.1) R38.1@793.44,587.54 ; v3@885,535 899.98,520.02 R27.1@917,520.02 cw(c917,545.63) v3@893.99,534.39 ; v3@893.51,526.49 ccw(c903.07,536.06) R27.1@911.94,525.84
  other v3: 885,530
NetD3_2: D3.2 R29.1 R39.1 | length 734.6
  Top Layer w12: v1(1455,535) v1(1555,535) ; v1@1461.36,528.64 cw(c1476.73,513.27) 1476.73,535 cw(c1476.73,556.73) v1@1461.36,541.36 ; v1@1548.64,528.64 ccw(c1533.27,513.27) 1533.27,535 ccw(c1533.27,556.73) v1@1548.64,541.36
  Bottom Layer w12: D3.2@1424,490 1424,504 v1(1455,535) ; D3.2@1430.9,490.93 cw(c1461.34,497.35) 1439.34,519.34 ; R39.1@1431.7,764.72 cw(c1411.7,744.71) 1439.98,744.71 cw(c1468.27,744.71) R39.1@1448.27,764.72 ; R39.1@1439.98,773 1439.98,735.02 1485,690 1485,595 1455,565 v1(1455,535) ; D3.2@1442.64,493.41 cw(c1487.19,502.81) v1(1455,535) ; v1@1446,535 cw(c1424.27,535) 1439.64,519.64 cw(c1455,504.27) v1@1455,526 ; v1@1448.64,541.36 ccw(c1433.27,556.73) 1455,556.73 ccw(c1476.73,556.73) v1@1461.36,541.36 ; R29.1@1569.47,517.92 ccw(c1555,515.29) 1555,530 1571.02,530 R29.1@1581,520.02
NetD4_2: D4.2 R31.1 R40.1 | length 756
  Top Layer w10: v1@1995,530 v1(2090,530) ; v1@2002.07,542.07 ccw(c2031.21,571.21) 2031.21,530 ; v1@2082.93,522.93 ccw(c2065.86,505.86) 2065.86,530 ccw(c2065.86,554.14) v1@2082.93,537.07
  Bottom Layer w10: R40.1@1907.37,763.64 cw(c1889.31,744.02) 1915.98,744.02 ; R40.1@1915.98,773 1915.98,744.02 ; R40.1@1924.59,763.64 ccw(c1942.65,744.02) 1915.98,744.02 ; D4.2@1960,490 1960,495 v1@1995,530 ; D4.2@1962.5,507.5 ccw(c1962.5,531.64) 1979.57,514.57 ; D4.2@1969.99,490.39 cw(c2001.2,492) 1979.1,514.1 ; D4.2@1974.39,509.39 ccw(c1948.79,535) v1@1985,535 ; D4.2@1979.98,490.9 cw(c2031.43,493.57) v1@1995,530 ; 1986.46,521.46 cw(c1995,512.93) v1@1995,525 ; 2105.42,530 cw(c2105.42,511.27) R31.1@2122.52,518.91 ; R31.1@2113.39,514.83 ccw(c2090,504.39) v1(2090,530) 2115.02,530 R31.1@2125,520.02 ; 1915.98,744.02 1970,690 1970,585 1995,560 v1@1995,530
  other v1: 1995,535
NetD7_2: D7.2 E3.1 R133.1 U8.2 | length 990.9
  Top Layer w20: D7.2@192.49,2697.67 cw(c220,2678.42) 220,2712 ; D7.2@192.49,2726.33 ccw(c220,2745.58) 220,2712 ; D7.2@195.19,2712 ccw(c195.19,2764.51) E3.1@247.13,2756.8 ; v3@207.93,2832.93 cw(c190.86,2815.86) 215,2815.86 cw(c239.14,2815.86) v3@222.07,2832.93 ; 209.25,2810.75 cw(c164.79,2766.28) E3.1@227.24,2758.96 ; v3@215,2850 215,2805 264,2756 220,2712 ; 218.38,2712 ccw(c218.38,2761.07) E3.1@266.91,2753.86 ; 225.75,2717.75 ccw(c209.61,2733.89) E3.1@229.9,2744.35 ; E3.1@227.35,2759.73 cw(c172,2767.95) D7.2@172,2712 220,2712 ; E3.1@228.71,2720.71 cw(c252.5,2696.92) E3.1@252.5,2730.57 ; E3.1@228.71,2791.29 ccw(c252.5,2815.08) E3.1@252.5,2781.43
  Bottom Layer w20: U8.2@166,2756 166,2821 178,2833 ; v3@207.41,2846.51 cw(c178,2871.76) 178,2833 ; v3@215,2850 v3@215,2833 ; v3@222.07,2847.07 ccw(c256.04,2881.04) 256.04,2833 ; R133.1@274.53,2827.54 ccw(c261.35,2814.37) 261.35,2833 ccw(c261.35,2851.63) R133.1@274.53,2838.46 ; R133.1@279.98,2833 v3@215,2833 ; 178,2833 v3@215,2833
  other v3: 215,2840
NetD8_2: D8.2 E4.1 R134.1 U9.2 | length 858.1
  Top Layer w30: D8.2@-8,2272 56,2208 132,2208 ; D8.2@28.87,2269.75 ccw(c93.45,2262.46) 47.5,2216.5 ; E4.1@132,2140 132,2208 ; 132,2210 v2(330,2210) ; E4.1@154.35,2154.55 cw(c207.09,2208) 132,2208
  Bottom Layer w20: v2@319.39,2199.39 cw(c293.79,2173.79) 330,2173.79 cw(c366.21,2173.79) v2@340.61,2199.39 ; U9.2@330,2152 v2(330,2210) 349,2229 R134.1@443.98,2229 ; U9.2@332,2190 cw(c385.11,2190) v2@347.56,2227.56 ; R134.1@438.53,2223.54 ccw(c425.35,2210.37) 425.35,2229 ccw(c425.35,2247.63) R134.1@438.53,2234.46
NetD9_2: D9.2 R145.1 | length 95.6
  Top Layer w20: R145.1@2318.53,3700.46 ccw(c2295.89,3723.1) 2327.91,3723.1 ; R145.1@2323.98,3695 2327.91,3698.92 D9.2@2327.91,3763.86
NetD10_1: D10.1 Q12.3 R153.1 R154.1 | length 582.7
  Bottom Layer w20: R153.1@35,1579.98 R154.1@35,1639.98 ; 35,1602.04 cw(c80.94,1602.04) 48.46,1634.53 cw(c61.63,1621.35) 61.63,1639.98 cw(c61.63,1658.61) R154.1@48.46,1645.44 ; 35,1617.93 ccw(c80.94,1617.93) R153.1@48.46,1585.44 ; R154.1@59.25,1639.98 cw(c59.25,1604.72) Q12.3@93.86,1611.43 ; Q12.3@74.23,1607.62 ccw(c35,1600.03) R154.1@35,1639.98 ; Q12.3@80.16,1618.84 ccw(c58.82,1640.18) 89,1640.18 ccw(c119.18,1640.18) Q12.3@97.84,1618.84 ; D10.1@80.39,1709.39 cw(c59.62,1688.62) 89,1688.62 ; 83.49,1639.98 cw(c83.49,1609.42) Q12.3@113.5,1615.23 ; Q12.3@89,1610 89,1650 ; 89,1678.96 cw(c132.04,1678.96) D10.1@101.61,1709.39 ; D10.1@96,1720 89,1713 89,1650 ; R154.1@35,1639.98 78.98,1639.98 89,1650
NetD12_1: D12.1 R170.1 | length 285.3
  Top Layer w10: R170.1@1159.98,2871 1191,2871 1223.14,2903.14 ; R170.1@1168.98,2862.01 cw(c1190.68,2840.3) 1190.68,2871 cw(c1190.68,2901.7) R170.1@1168.98,2879.99 ; 1193.22,2873.22 cw(c1240.1,2826.35) D12.1@1240.1,2892.64 ; 1210.29,2890.29 cw(c1240.1,2860.49) D12.1@1240.1,2902.64 ; 1214.66,2894.66 cw(c1224.23,2885.09) D12.1@1233.16,2895.25 ; 1222.2,2902.2 cw(c1231.28,2893.11) D12.1@1239.76,2902.76 ; D12.1@1230.7,2898.46 ccw(c1223.14,2894.69) 1223.14,2903.14 ; D12.1@1230.7,2907.82 cw(c1223.14,2911.58) 1223.14,2903.14 ; D12.1@1240.1,2903.14 1223.14,2903.14
NetD13_1: D13.1 R169.1 | length 152
  Top Layer w10: R169.1@1825.91,2613.93 1851.88,2639.9 D13.1@1879.14,2639.9 ; R169.1@1825.91,2626.65 ccw(c1825.91,2657.35) 1847.62,2635.64 ccw(c1869.33,2613.93) R169.1@1838.63,2613.93 ; D13.1@1871.71,2632.48 ccw(c1853.79,2614.56) 1853.79,2639.9 ccw(c1853.79,2665.25) D13.1@1871.71,2647.33
NetF4_1: F4.1 Q11.1 R153.2 | length 406
  Bottom Layer w30: -65,1666.41 cw(c-26.41,1666.41) Q11.1@-53.7,1693.7 ; Q11.1@-59,1699 -65,1693 -65,1599.98 -45,1579.98 -27.99,1579.98 -27.99,1527.99 ; -52.5,1587.48 ccw(c-33.34,1606.64) R153.2@-21.21,1582.41 ; -27.99,1536.64 ccw(c20.14,1536.64) F4.1@-13.89,1502.61 ; -27.99,1554.11 cw(c5.88,1554.11) R153.2@-18.07,1578.06 ; F4.1@-15.77,1504.19 cw(c1.28,1527.99) -27.99,1527.99 ; F4.1@8,1492 -27.99,1527.99
NetJ1_2: J1.2 Q1.3 | length 449.2
  Bottom Layer w20: J1.2@2108,2352 2247,2352 2271,2376 Q1.3@2271,2510 ; J1.2@2125.68,2334.32 cw(c2168.36,2291.64) 2168.36,2352 cw(c2168.36,2412.36) J1.2@2125.68,2369.68 ; Q1.3@2262.16,2501.16 cw(c2240.82,2479.82) 2271,2479.82 cw(c2301.18,2479.82) Q1.3@2279.84,2501.16
NetJ3_2: J3.2 Q2.3 | length 330.9
  Top Layer w20: Q2.3@2302,1735 2335,1735 2438,1632 J3.2@2440,1632 ; Q2.3@2310.84,1726.16 cw(c2332.18,1704.82) 2332.18,1735 cw(c2332.18,1765.18) Q2.3@2310.84,1743.84 ; 2393.91,1676.09 ccw(c2440,1722.18) J3.2@2440,1657 ; 2398.74,1671.26 cw(c2359.47,1632) J3.2@2415,1632 ; J3.2@2428,1632 J3.2@2436,1632
NetJ12_1: J12.1 R161.2 | length 235.7
  Bottom Layer w30: J12.1@312.2,1804.52 354.48,1804.52 R161.2@387.02,1771.98 ; J12.1@317.68,1819.99 cw(c317.68,1768.48) 354.1,1804.9 ; J12.1@325.12,1792.04 cw(c345.2,1758.43) R161.2@372.89,1786.11 ; J12.1@327.95,1794.24 cw(c352.75,1769.44) 352.75,1804.52 cw(c352.75,1839.59) J12.1@327.95,1814.79
NetJ13_1: J13.1 U15.6 | length 193.1
  Top Layer w20: J13.1@2338.32,2561.68 ccw(c2291.69,2608.31) 2357.64,2608.31 ; U15.6@2352.55,2626.72 cw(c2340.25,2614.43) 2357.64,2614.43 ; J13.1@2356,2544 2357.64,2545.64 U15.6@2357.64,2628 ; 2357.64,2600.4 ccw(c2412.4,2600.4) J13.1@2373.68,2561.68
NetJ13_2: J13.2 U15.1 | length 194.1
  Top Layer w20: J13.2@2438.32,2561.68 ccw(c2385.99,2614.01) 2460,2614.01 ; U15.1@2454.91,2626.72 cw(c2442.62,2614.43) 2460,2614.43 ; J13.2@2456,2544 2460,2548 U15.1@2460,2628 ; 2460,2594.7 ccw(c2506.7,2594.7) J13.2@2473.68,2561.68
NetLCD1_7: LCD1.7 R2.2 | length 284
  Top Layer w9: R2.2@2195.99,1710.77 cw(c2195.99,1678.86) 2218.55,1701.42 cw(c2241.12,1723.98) R2.2@2209.21,1723.98 ; LCD1.7@2201.89,1520 2201.89,1571.89 2225,1595 2225,1694.98 R2.2@2195.99,1723.98 R2.2@2201.89,1718.09
NetQ1_2: Q1.2 R1.1 | length 117.4
  Bottom Layer w20: R1.1@2139,2467.98 2186.98,2467.98 Q1.2@2191,2472 ; R1.1@2144.46,2462.53 cw(c2157.63,2449.35) 2157.63,2467.98 cw(c2157.63,2486.61) R1.1@2144.46,2473.44 ; R1.1@2151.13,2467.98 ccw(c2151.13,2511.87) Q1.2@2182.16,2480.84
NetQ2_2: Q2.2 R3.1 | length 282
  Top Layer w9: R3.1@2195,1784.02 2230.98,1784.02 2245,1770 2245,1705 2264,1686 ; R3.1@2204.35,1774.67 cw(c2226.91,1752.11) 2226.91,1784.02 cw(c2226.91,1815.92) R3.1@2204.35,1793.36 ; Q2.2@2255.08,1670.63 ccw(c2246.31,1686) 2264,1686 ; Q2.2@2264,1639 2264,1686 ; Q2.2@2272.92,1670.63 cw(c2281.69,1686) 2264,1686
NetQ3_2: Q3.2 R13.2 R33.1 | length 214.9
  Bottom Layer w20: Q3.2@278.37,780.56 ccw(c247.37,811.55) 291.2,811.55 ; R13.2@284.76,826.25 cw(c269.19,810.68) 291.2,810.68 ; R13.2@284.76,837.16 ccw(c269.19,852.73) 291.2,852.73 ; R33.1@285.75,881.28 cw(c272.57,868.11) 291.2,868.11 cw(c309.83,868.11) R33.1@296.66,881.28 ; Q3.2@287.2,771.72 291.2,775.72 R33.1@291.2,886.74
NetQ3_3: Q3.3 R26.2 | length 237.4
  Bottom Layer w20: R26.2@277.93,631.7 cw(c308.69,631.7) 286.94,653.45 ; R26.2@284.76,637.16 ccw(c271.58,650.33) 290.21,650.33 ccw(c308.84,650.33) R26.2@295.67,637.16 ; R26.2@290.21,631.7 290.21,656.73 Q3.3@325.2,691.72 ; R26.2@297.93,631.7 cw(c376.97,631.7) Q3.3@321.08,687.6 ; 299.6,666.11 cw(c325.2,640.51) Q3.3@325.2,676.72 ; Q3.3@305.63,672.15 ccw(c288.56,689.22) Q3.3@312.7,689.22
NetQ4_2: Q4.2 R14.2 R34.1 | length 222
  Bottom Layer w20: Q4.2@903.16,781.84 ccw(c869.75,815.25) 917,815.25 ; R14.2@910.55,830.53 cw(c894.98,814.96) 917,814.96 ; R14.2@910.55,841.44 ccw(c894.98,857.01) 917,857.01 ; R34.1@911.54,886.56 cw(c898.37,873.39) 917,873.39 cw(c935.63,873.39) R34.1@922.46,886.56 ; Q4.2@912,773 917,778 R34.1@917,892.02
NetQ4_3: Q4.3 R28.2 | length 245.6
  Bottom Layer w20: R28.2@903.72,631.98 cw(c939.31,631.98) 914.15,657.15 ; R28.2@910.55,637.44 ccw(c897.38,650.61) 916.01,650.61 ccw(c934.64,650.61) R28.2@921.46,637.44 ; R28.2@916.01,631.98 916.01,659.01 Q4.3@950,693 ; R28.2@923.72,631.98 cw(c1007.6,631.98) Q4.3@948.29,691.29 ; 924.39,667.39 cw(c950,641.79) Q4.3@950,678 ; Q4.3@930.43,673.43 ccw(c913.36,690.5) Q4.3@937.5,690.5
NetQ5_2: Q5.2 R15.2 R35.1 | length 247.3
  Bottom Layer w20: Q5.2@1547.16,781.84 ccw(c1525.82,803.18) 1556,803.18 ccw(c1586.18,803.18) Q5.2@1564.84,781.84 ; Q5.2@1556,773 1556,887.02 R35.1@1561,892.02 ; 1556,807.68 cw(c1588.31,807.68) R15.2@1565.46,830.53 ; 1556,861.32 cw(c1591.7,861.32) R35.1@1566.46,886.56 ; 1556,864.29 ccw(c1588.31,864.29) R15.2@1565.46,841.44
NetQ5_3: Q5.3 R30.2 | length 245.6
  Bottom Layer w20: R30.2@1547.72,631.98 cw(c1583.31,631.98) 1558.15,657.15 ; R30.2@1554.55,637.44 ccw(c1541.38,650.61) 1560.01,650.61 ccw(c1578.64,650.61) R30.2@1565.46,637.44 ; R30.2@1560.01,631.98 1560.01,659.01 Q5.3@1594,693 ; R30.2@1567.72,631.98 cw(c1651.6,631.98) Q5.3@1592.29,691.29 ; 1568.39,667.39 cw(c1594,641.79) Q5.3@1594,678 ; Q5.3@1574.43,673.43 ccw(c1557.36,690.5) Q5.3@1581.5,690.5
NetQ6_2: Q6.2 R16.2 R36.1 | length 243.7
  Bottom Layer w20: Q6.2@2023.16,781.84 ccw(c1982.49,822.51) R16.2@2040.01,822.51 ; Q6.2@2032,773 2040.01,781.01 R16.2@2040.01,835.98 2040.01,891.02 R36.1@2041,892.02 ; R16.2@2034.55,830.53 cw(c2021.38,817.35) 2040.01,817.35 cw(c2058.64,817.35) R16.2@2045.46,830.53 ; R16.2@2034.55,841.44 ccw(c2021.38,854.61) 2040.01,854.61 ccw(c2058.64,854.61) R16.2@2045.46,841.44 ; 2040.01,870.99 cw(c2062.02,870.99) R36.1@2046.46,886.56
NetQ6_3: Q6.3 R32.2 | length 129.3
  Bottom Layer w20: Q6.3@2061.16,681.66 cw(c2039.82,660.32) 2070,660.32 cw(c2100.18,660.32) Q6.3@2078.84,681.66 ; 2070,655.46 ccw(c2095.49,655.46) R32.2@2077.46,637.44 ; Q6.3@2070,693 2070,633.99 R32.2@2072.01,631.98
NetQ7_2: Q7.2 R21.1 R41.2 | length 233.3
  Bottom Layer w20: Q7.2@278.37,1040.56 ccw(c257.03,1061.9) 287.2,1061.9 ccw(c317.38,1061.9) Q7.2@296.04,1040.56 ; R41.2@284.76,1097.16 ccw(c269.19,1112.73) 291.2,1112.73 ; R21.1@285.75,1141.28 cw(c272.57,1128.11) 291.2,1128.11 cw(c309.83,1128.11) R21.1@296.66,1141.28 ; Q7.2@287.2,1031.72 287.2,1088.7 R41.2@290.21,1091.7 291.2,1092.7 R21.1@291.2,1146.74 ; 287.2,1065.81 cw(c316.1,1065.81) R41.2@295.67,1086.25
NetQ7_3: Q7.3 R33.2 | length 276.5
  Bottom Layer w20: Q7.3@319.36,938.17 cw(c288.78,880.34) R33.2@354.2,880.34 ; Q7.3@325.2,936.72 cw(c325.2,900.51) 350.81,926.11 ; Q7.3@325.2,951.72 354.2,922.73 R33.2@354.2,886.74 ; Q7.3@328.71,955.85 cw(c306.34,913.54) 354.2,913.54 ; Q7.3@337.7,949.22 ccw(c361.85,949.22) Q7.3@344.78,932.15 ; R33.2@348.74,892.19 ccw(c335.57,905.37) 354.2,905.37 ccw(c372.83,905.37) R33.2@359.65,892.19
NetQ8_2: Q8.2 R22.1 R42.2 | length 243.3
  Bottom Layer w20: Q8.2@903.16,1041.84 ccw(c881.82,1063.18) 912,1063.18 ccw(c942.18,1063.18) Q8.2@920.84,1041.84 ; Q8.2@912,1033 912,1143.02 R22.1@917,1148.02 ; 912,1063.68 cw(c944.31,1063.68) R42.2@921.46,1086.53 ; 912,1117.32 cw(c947.7,1117.32) R22.1@922.46,1142.56 ; 912,1120.29 ccw(c944.31,1120.29) R42.2@921.46,1097.44
NetQ8_3: Q8.3 R34.2 | length 270.9
  Bottom Layer w20: Q8.3@944.87,939.1 cw(c920.42,884.78) R34.2@979.99,884.78 ; Q8.3@950,938 cw(c950,901.79) 975.61,927.39 ; Q8.3@950,953 979.99,923.01 R34.2@979.99,892.02 ; Q8.3@953.08,957.34 cw(c934.34,915.71) 979.99,915.71 ; Q8.3@962.5,950.5 ccw(c986.64,950.5) Q8.3@969.57,933.43 ; R34.2@974.54,897.47 ccw(c961.36,910.65) 979.99,910.65 ccw(c998.62,910.65) R34.2@985.45,897.47
NetQ9_2: Q9.2 R23.1 R43.2 | length 239.7
  Bottom Layer w20: Q9.2@1547.16,1041.84 ccw(c1506.49,1082.51) R43.2@1564.01,1082.51 ; Q9.2@1556,1033 1564.01,1041.01 R43.2@1564.01,1091.98 1564.01,1147.02 R23.1@1565,1148.02 ; R43.2@1558.55,1086.53 cw(c1545.38,1073.35) 1564.01,1073.35 cw(c1582.64,1073.35) R43.2@1569.46,1086.53 ; R43.2@1558.55,1097.44 ccw(c1545.38,1110.61) 1564.01,1110.61 ccw(c1582.64,1110.61) R43.2@1569.46,1097.44 ; 1564.01,1126.99 cw(c1586.02,1126.99) R23.1@1570.46,1142.56
NetQ9_3: Q9.3 R35.2 | length 270.9
  Bottom Layer w20: Q9.3@1588.87,939.1 cw(c1564.42,884.78) R35.2@1623.99,884.78 ; Q9.3@1594,938 cw(c1594,901.79) 1619.61,927.39 ; Q9.3@1594,953 1623.99,923.01 R35.2@1623.99,892.02 ; Q9.3@1597.08,957.34 cw(c1578.34,915.71) 1623.99,915.71 ; Q9.3@1606.5,950.5 ccw(c1630.64,950.5) Q9.3@1613.57,933.43 ; R35.2@1618.54,897.47 ccw(c1605.36,910.65) 1623.99,910.65 ccw(c1642.62,910.65) R35.2@1629.45,897.47
NetQ10_2: Q10.2 R24.1 R44.2 | length 218
  Bottom Layer w20: Q10.2@2023.16,1041.84 ccw(c1989.75,1075.25) R44.2@2037,1075.25 ; R44.2@2030.55,1086.53 cw(c2014.98,1070.96) 2037,1070.96 ; R44.2@2030.55,1097.44 ccw(c2014.98,1113.01) 2037,1113.01 ; R24.1@2031.54,1142.56 cw(c2018.37,1129.39) 2037,1129.39 cw(c2055.63,1129.39) R24.1@2042.46,1142.56 ; Q10.2@2032,1033 2037,1038 R24.1@2037,1148.02
NetQ10_3: Q10.3 R36.2 | length 245.4
  Bottom Layer w20: Q10.3@2070,938 cw(c2070,901.79) 2095.61,927.39 ; Q10.3@2070,953 2103.99,919.01 R36.2@2103.99,892.02 ; Q10.3@2071.73,951.27 cw(c2012.48,892.02) R36.2@2096.28,892.02 ; Q10.3@2082.5,950.5 ccw(c2106.64,950.5) Q10.3@2089.57,933.43 ; R36.2@2098.54,897.47 ccw(c2085.36,910.65) 2103.99,910.65 ccw(c2122.62,910.65) R36.2@2109.45,897.47 ; 2105.88,917.13 cw(c2080.77,892.02) R36.2@2116.28,892.02
NetQ11_2: Q11.2 R154.2 | length 159.2
  Bottom Layer w20: R154.2@-27.99,1639.98 16,1683.98 Q11.2@16,1699 ; R154.2@-15.96,1652.01 ccw(c-62.95,1699) Q11.2@3.5,1699 ; R154.2@-12.28,1639.98 cw(c25.67,1639.98) -1.16,1666.81
NetQ12_2: Q12.2 R157.1 | length 127.5
  Bottom Layer w20: Q12.2@169,1648 174,1643 R157.1@228.02,1643 ; Q12.2@177.84,1656.84 ccw(c211.25,1690.25) R157.1@211.25,1643 ; R157.1@222.56,1637.54 ccw(c209.39,1624.37) 209.39,1643 ccw(c209.39,1661.63) R157.1@222.56,1648.46
NetR8_1: R8.1 R9.2 U3.1 | length 247.3
  Bottom Layer w20: R8.1@1465.54,1881.44 ccw(c1452.37,1894.61) 1471,1894.61 ccw(c1489.63,1894.61) R8.1@1476.46,1881.44 ; R8.1@1471,1875.98 1471,1926 1485.01,1940.01 R9.2@1536.02,1940.01 ; 1471,1899.62 cw(c1507.38,1899.62) 1481.66,1925.34 cw(c1517.06,1889.94) 1517.06,1940.01 ; R9.2@1530.56,1934.55 ccw(c1517.39,1921.38) 1517.39,1940.01 ccw(c1517.39,1958.64) R9.2@1530.56,1945.46
NetR11_2: R11.2 R12.1 U1.143 | length 356.8
  Top Layer w10: U1.143@793.65,2296.88 v1(840.53,2250) ; v1@830.53,2250 ccw(c806.39,2250) 823.46,2267.07 ccw(c840.53,2284.14) v1@840.53,2260
  Bottom Layer w10: v1(840.53,2250) 845.17,2245.37 958.47,2245.37 R12.1@961.93,2241.91 ; v1@847.6,2257.07 ccw(c875.86,2285.33) R11.2@875.86,2245.37 ; R11.2@878.38,2236.37 cw(c900.09,2214.67) 900.09,2245.37 cw(c900.09,2276.07) R11.2@878.38,2254.36 ; 922.88,2245.37 cw(c922.88,2202.86) R12.1@952.94,2232.92 ; 939.58,2245.37 ccw(c939.58,2264.26) R12.1@952.94,2250.9
NetR65_2: R65.2 U4.6 | length 519.1
  Top Layer w12: R65.2@378.92,688 ccw(c358.92,708) 387.2,708 ccw(c415.49,708) R65.2@395.49,688 ; R65.2@387.2,679.71 387.2,732.2 455,800 465,800 500,835 530,835 565,800 590,800 680,800 699.95,819.95 U4.6@699.95,864
NetR66_2: R66.2 U4.11 | length 822.4
  Top Layer w10: U4.11@648.77,1115.97 648.77,1076.23 700,1025 760,965 760,910 v1(760,880) ; v1(730,715) 757.01,687.99 R66.2@852.02,687.99 ; v1@752.93,887.07 ccw(c735.86,904.14) 760,904.14 ccw(c784.14,904.14) v1@767.07,887.07 ; R66.2@843.02,679 ccw(c821.32,657.29) 821.32,687.99 ccw(c821.32,718.69) R66.2@843.02,696.98
  Bottom Layer w10: v1@730,725 ccw(c730,773.28) 764.14,739.14 ; 747.07,722.07 cw(c730,739.14) v1(730,715) 740,715 785,760 785,835 760,860 v1(760,880) ccw(c780.37,871.08) 764.64,855.36 ; v1@769.16,875.99 ccw(c794.77,864.77) 775,845
NetR67_2: R67.2 U5.6 | length 368.8
  Top Layer w10: R67.2@1620.02,679.99 1659.99,679.99 1755,775 1800,775 1819.95,794.95 U5.6@1819.95,868 ; R67.2@1629.01,671 cw(c1650.72,649.29) 1650.72,679.99 cw(c1650.72,710.69) R67.2@1629.01,688.98
NetR68_2: R68.2 U5.11 | length 596.7
  Top Layer w10: U5.11@1768.77,1119.97 1768.77,1096.23 1785,1080 1810,1080 1835,1055 1835,1010 1865,980 1865,775.01 R68.2@1960.02,679.99 ; U5.11@1770.07,1102.65 ccw(c1788.7,1102.65) 1775.53,1089.47 ; R68.2@1947.3,679.99 ccw(c1916.6,679.99) 1938.31,701.7 ccw(c1960.02,723.41) R68.2@1960.02,692.71
NetR78_2: R78.2 U5.9 | length 329.2
  Top Layer w10: U5.9@1819.95,1119.97 1819.95,1095.05 1845.83,1069.17 1855.83,1069.17 1905,1020 1905,970 1924.02,950.98 ; U5.9@1821.25,1102.65 ccw(c1842.74,1102.65) 1827.55,1087.45 ; 1910.04,964.96 cw(c1882.13,937.05) R78.2@1921.32,932.32 ; R78.2@1919.17,943.75 ccw(c1916.19,950.98) 1924.02,950.98 ; R78.2@1924.02,931.99 1924.02,950.98 ; 1924.58,950.42 cw(c1908.07,933.92) R78.2@1931.25,931.12 ; R78.2@1928.86,943.75 cw(c1931.84,950.98) 1924.02,950.98
NetR80_2: R80.2 U4.2 | length 245.2
  Top Layer w12: R80.2@442.2,929.71 505,929.71 505.29,929.71 530,905 587.59,905 597.59,895 U4.2@597.59,864 ; R80.2@450.49,921.43 cw(c470.49,901.43) 470.49,929.71 cw(c470.49,958) R80.2@450.49,938
NetR82_2: R82.2 U4.9 | length 308.1
  Top Layer w10: U4.9@699.95,1115.97 699.95,1055.05 823.01,931.99 ; R82.2@842.66,923.38 ccw(c823.01,905.27) 823.01,931.99 ; R82.2@842.66,940.61 cw(c823.01,958.72) 823.01,931.99 ; R82.2@852.02,931.99 823.01,931.99
NetR84_2: R84.2 U5.2 | length 201.2
  Top Layer w10: R84.2@1620.02,931.99 1703.01,931.99 1717.59,917.41 U5.2@1717.59,868 ; R84.2@1629.01,923 cw(c1650.72,901.29) 1650.72,931.99 cw(c1650.72,962.69) R84.2@1629.01,940.98
NetR133_2: R133.2 U8.7 | length 215.6
  Bottom Layer w20: U8.7@166,2976 166,2909 179.01,2895.99 R133.2@279.98,2895.99 ; R133.2@274.53,2890.54 ccw(c261.35,2877.36) 261.35,2895.99 ccw(c261.35,2914.62) R133.2@274.53,2901.45
NetR134_2: R134.2 U9.7 | length 245.2
  Bottom Layer w20: U9.7@330,2372 330,2315 353.01,2291.99 R134.2@443.98,2291.99 ; U9.7@331.99,2333.8 ccw(c371.8,2329.79) 343.51,2301.49 ; R134.2@438.53,2286.54 ccw(c425.35,2273.36) 425.35,2291.99 ccw(c425.35,2310.62) R134.2@438.53,2297.45
NetR135_1: R135.1 R136.2 | length 173.9
  Bottom Layer w12: R136.2@104.99,3120 R135.1@190,3120 ; R136.2@116.28,3111.73 cw(c136.24,3091.77) 136.24,3120 ; R136.2@116.28,3128.3 ccw(c136.32,3148.34) 136.32,3120 ; 164.68,3120 ccw(c164.68,3148.34) R135.1@184.72,3128.3 ; 164.75,3120 cw(c164.75,3091.77) R135.1@184.72,3111.73
NetR136_1: R136.1 R139.2 U8.5 | length 260.7
  Bottom Layer w20: R139.2@38.55,3069.44 ccw(c22.98,3085.01) 45,3085.01 ; R136.1@39.54,3114.56 cw(c26.37,3101.39) 45,3101.39 cw(c63.63,3101.39) R136.1@50.46,3114.56 ; R136.1@45,3120.02 45,3050 66,3029 U8.5@66,2976 ; R139.2@51.55,3062.37 ccw(c80.25,3056.25) 59.5,3035.5 ; 51.98,3043.02 cw(c22.96,3014) U8.5@64,3014
NetR137_1: R137.1 R138.2 | length 232.4
  Bottom Layer w20: R138.2@260.99,2522.02 335,2522.02 R137.1@337,2520.02 ; R138.2@272.99,2522.02 R137.1@330,2522.02 ; 279.62,2522.02 ccw(c279.62,2503.39) 266.45,2516.56 cw(c279.62,2503.39) 279.62,2522.02 ; 279.62,2522.02 cw(c279.62,2540.65) 266.45,2527.47 ccw(c279.62,2540.65) 279.62,2522.02 ; 313.54,2522.02 cw(c313.54,2496.56) 331.54,2514.56 ccw(c313.54,2496.56) 313.54,2522.02
NetR138_1: R138.1 R140.2 U9.5 | length 256.9
  Bottom Layer w20: R140.2@191.55,2467.44 ccw(c178.38,2480.61) 197.01,2480.61 ccw(c215.64,2480.61) R140.2@202.46,2467.44 ; 197.01,2500.99 cw(c219.02,2500.99) R138.1@203.46,2516.56 ; R138.1@198,2522.02 197.01,2521.02 197.01,2442.99 230,2410 U9.5@230,2372 ; R140.2@204.71,2461.48 ccw(c258.92,2457.91) 220.5,2419.5
NetR144_1: R144.1 R147.2 R152.2 | length 328.2
  Top Layer w20: R147.2@2262.56,3697.45 ccw(c2239.81,3720.2) v1@2271.98,3720.2 ; v1@2266.46,3726.46 cw(c2253.14,3713.14) 2271.98,3713.14 ; v1@2266.46,3733.54 ccw(c2253.14,3746.86) R152.2@2271.98,3746.86 ; R152.2@2266.53,3758.55 cw(c2253.35,3745.38) 2271.98,3745.38 cw(c2290.61,3745.38) R152.2@2277.44,3758.55 ; R147.2@2268.02,3695.99 2271.98,3699.96 R152.2@2271.98,3764.01
  Bottom Layer w20: R144.1@2187.16,3687.1 2252.1,3687.1 2270,3705 v1(2270,3730) ; R144.1@2192.61,3681.65 cw(c2205.79,3668.47) 2205.79,3687.1 cw(c2205.79,3705.73) R144.1@2192.61,3692.56 ; 2264.6,3699.6 ccw(c2250.13,3714.07) v1@2266.1,3726.87
NetR150_2: R150.2 USB1.4 | length 133.6
  Bottom Layer w20: USB1.4@2076.75,3967.38 ccw(c2053.49,3990.63) 2086.38,3990.63 ccw(c2119.26,3990.63) USB1.4@2096.01,3967.38 ; USB1.4@2086.38,3957.74 2086.38,4018.37 R150.2@2088.02,4020.01 ; 2086.38,3997.42 cw(c2110.6,3997.42) R150.2@2093.47,4014.55
NetR165_2: R165.2 U14.26 | length 272.2
  Top Layer w10: v1@2035.02,2875.02 R165.2@2071.01,2875.02 ccw(c2071.01,2845.49) v1@2047.85,2863.8 ; R165.2@2062.02,2866.02 ccw(c2040.31,2844.32) 2040.31,2875.02 ccw(c2040.31,2905.72) R165.2@2062.02,2884.01
  Bottom Layer w10: U14.26@1970.91,2812.41 2022.41,2812.41 2040,2830 v1(2040,2870) v1@2035,2875 ; v1@2032.93,2862.93 cw(c2015.86,2845.86) 2040,2845.86 cw(c2064.14,2845.86) v1@2047.07,2862.93
NetR167_1: R167.1 U14.33 U14.34 | length 222.4
  Top Layer w10: R167.1@2035.02,2932 2042,2932 v1(2065,2955) cw(c2039.64,2980.36) R167.1@2036.23,2944.66 ; R167.1@2047.73,2932 cw(c2061.57,2932) R167.1@2051.79,2941.79
  Bottom Layer w10: U14.34@1970.91,2969.89 U14.33@1970.91,2950.2 v1@2059.8,2950.2 ; 2029.28,2950.2 ccw(c2029.28,2990.72) v1@2057.93,2962.07
NetR168_1: R168.1 U14.46 | length 951.4
  Top Layer w10: R168.1@2353,2811.98 2386.02,2845 2485,2845 2500,2860 v1(2500,3130) ; R168.1@2353,2824.7 ccw(c2353,2855.4) 2374.71,2833.69 ccw(c2396.42,2811.98) R168.1@2365.72,2811.98
  Bottom Layer w10: U14.46@2201.22,3062.41 2201.22,3141.22 2215,3155 2400,3155 2415,3140 2490,3140 v1(2500,3130) ccw(c2475.86,3105.86) 2475.86,3140 ; 2451.72,3140 cw(c2451.72,3081.72) v1@2492.93,3122.93